# Altium PCB Webbie-V3.0.PcbDoc (part 2 of 3)
Units mil, origin at the board's own origin, x right, y up, seen from the top; angles counter-clockwise.
Board outline 3937.01 x 1574.8 mil, 2 copper layers (Top Layer, Bottom Layer), stack 62.8 mil thick; 134 components, 93 nets, 484 pads, 190 vias.
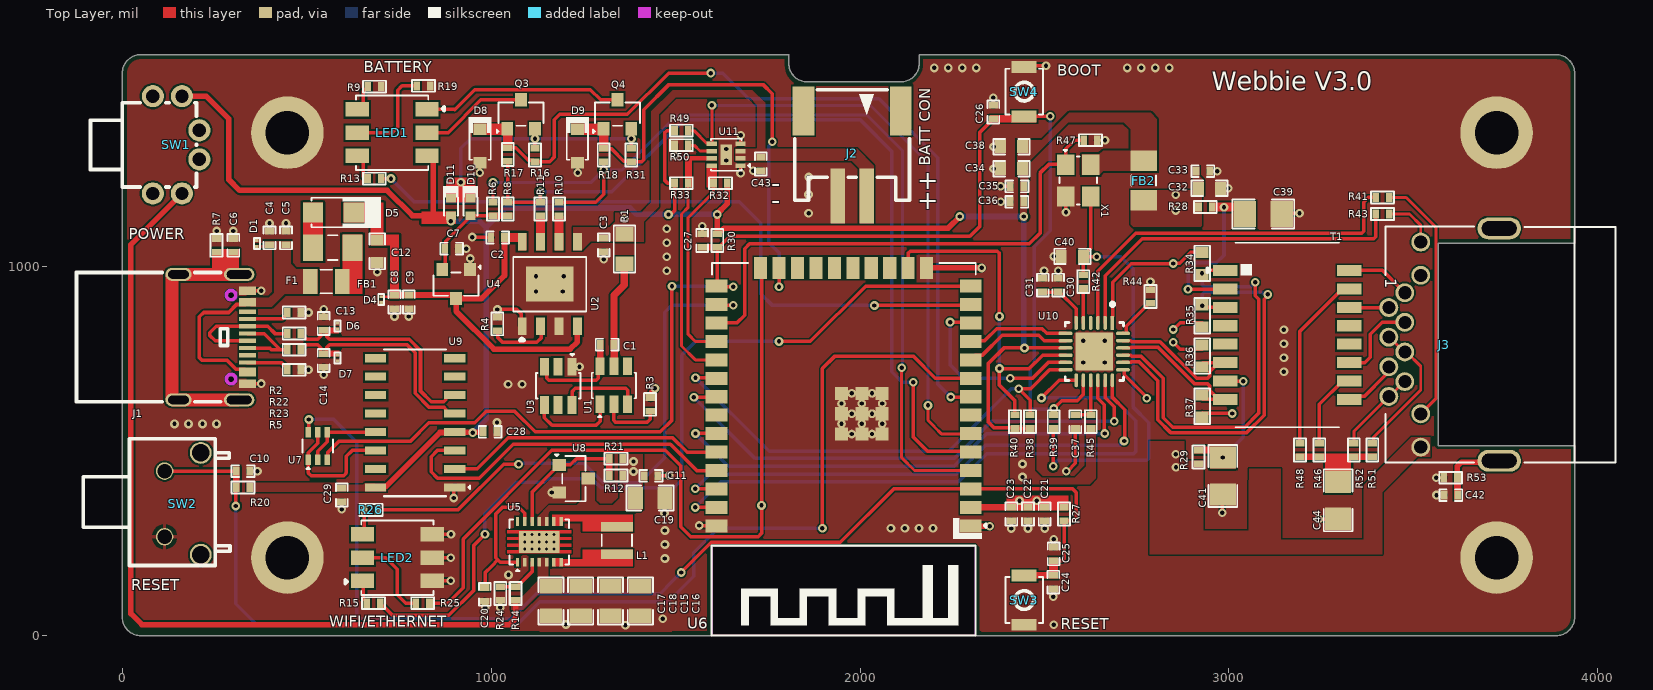
[diagram p0: Top Layer view]

## Part data (continued)
R2 R5: library part RC0402FR-075K1L, "RES 5.1K OHM 1% 1/16W 0402", Case Code (Imperial)=0402, Case Code (Metric)=1005, LCSC Part Number=C105872, Manufacturer=Yageo, Max Operating Temperature=155°C, Max Power Dissipation=63mW, Min Operating Temperature=-55°C, Package Quantity=1, Resistance=5.1kR, Resistance Tolerance=1%, Resistor Type="Thick Film", Temperature Coefficient=100ppm/°C, Voltage Rating=50V, Case/Package=0402, Category="Chip SMD Resistors", ComponentLink1Description=https://datasheet.ciiva.com/7983/1018594-7983519.pdf?src-supplier=Element14, ComponentLink1URL=https://datasheet.ciiva.com/7983/1018594-7983519.pdf?src-supplier=Element14, ComponentLink2Description=https://datasheet.ciiva.com/46394/1018594-46394936.pdf?src-supplier=Element14, ComponentLink2URL=https://datasheet.ciiva.com/46394/1018594-46394936.pdf?src-supplier=Element14, ComponentLink3Description=https://datasheet.ciiva.com/2453/pyu-r-int-thick-7-2453401.pdf?src-supplier=Digi-Key, ComponentLink3URL=https://datasheet.ciiva.com/2453/pyu-r-int-thick-7-2453401.pdf?src-supplier=Digi-Key, ComponentLink4Description=https://datasheet.ciiva.com/2453/pyu-r-int-thick-7-2453402.pdf?src-supplier=Digi-Key, ComponentLink4URL=https://datasheet.ciiva.com/2453/pyu-r-int-thick-7-2453402.pdf?src-supplier=Digi-Key, ComponentLink5Description=https://datasheet.ciiva.com/2453/pyu-r-int-thick-7-2453400.pdf?src-supplier=Digi-Key, ComponentLink5URL=https://datasheet.ciiva.com/2453/pyu-r-int-thick-7-2453400.pdf?src-supplier=Digi-Key, ComponentLink6Description=https://datasheet.ciiva.com/12558/pyu-rc0402-51-rohs-l-6-r-8721-12558460.pdf?src-supplier=Mouser, ComponentLink6URL=https://datasheet.ciiva.com/12558/pyu-rc0402-51-rohs-l-6-r-8721-12558460.pdf?src-supplier=Mouser, ComponentLink7Description=https://datasheet.ciiva.com/16744/pyu-rc0402-51-rohs-l-6-r-16744283.pdf?src-supplier=Future+Electronics, ComponentLink7URL=https://datasheet.ciiva.com/16744/pyu-rc0402-51-rohs-l-6-r-16744283.pdf?src-supplier=Future+Electronics, ComponentLink8Description=https://datasheet.ciiva.com/15189/getdatasheetpartid-323636-15189493.pdf?src-supplier=Verical, ComponentLink8URL=https://datasheet.ciiva.com/15189/getdatasheetpartid-323636-15189493.pdf?src-supplier=Verical, Construction=Rectangular, Depth=0.5mm, Features="Moisture Resistant", Height=0.016inch, Item Type=Resistor, Lead Free="Lead Free", Length=1mm, Manufacturer Part Number=RC0402FR-075K1L, Military Standard=Not, Number of Terminations=2, Packaging="Tape and Reel", Power Rating=63mW, Pricing 1="10000=0.00085 (USD)", RoHS=Yes, RoHS Compliant=Yes, Series=RC, Stock 1=65000, Supplier 1=Avnet, Supplier Part Number 1=RC0402FR-075K1L, Technology="THICK FILM", Termination=SMD/SMT, Tolerance=1%, Voltage Rating (DC)=50V, Width=0.02inch, Working Voltage=50V
R3 R41 R43: library part CRCW04021K00FKEDHP, "RES SMD 1K OHM 1% 1/5W 0402", Case Code (Imperial)=0402, Case Code (Metric)=1005, LCSC Part Number=C313354, Manufacturer="Vishay Dale", Max Operating Temperature=155°C, Max Power Dissipation=125mW, Min Operating Temperature=-55°C, Package Quantity=10, Resistance=1kR, Resistance Tolerance=1%, Resistor Type="Thick Film", Supplier Part Number 1=541-1.00KYCT-ND, Temperature Coefficient=100ppm/°C, Voltage Rating=50V, Case/Package=0402, ComponentLink1Description=http://www.farnell.com/datasheets/2339608.pdf?src-supplier=Element14, ComponentLink1URL=http://www.farnell.com/datasheets/2339608.pdf?src-supplier=Element14, ComponentLink2Description=http://www.vishay.com/docs/20043/crcwhpe3.pdf?src-supplier=Digi-Key, ComponentLink2URL=http://www.vishay.com/docs/20043/crcwhpe3.pdf?src-supplier=Digi-Key, ComponentLink3Description=http://www.mouser.com/ds/2/427/crcwhpe3-46056.pdf?src-supplier=Mouser, ComponentLink3URL=http://www.mouser.com/ds/2/427/crcwhpe3-46056.pdf?src-supplier=Mouser, ComponentLink4Description=http://www.vishay.com/docs/20043/crcwhpe3.pdf?src-supplier=Avnet, ComponentLink4URL=http://www.vishay.com/docs/20043/crcwhpe3.pdf?src-supplier=Avnet, ComponentLink5Description=http://www.vishay.com/docs/20043/crcwhpe3.pdf?src-supplier=Future+Electronics, ComponentLink5URL=http://www.vishay.com/docs/20043/crcwhpe3.pdf?src-supplier=Future+Electronics, Construction=Rectangular, Contact Plating=Tin, Depth=0.5mm, Features="Automotive AEC-Q200", Height=0.3mm, Lead Free="Lead Free", Length=1mm, Manufacturer Part Number=CRCW04021K00FKEDHP, Military Standard=Not, Mount="Surface Mount", Number of Pins=2, Number of Terminations=2, Packaging="Tape and Reel", Power Rating=125mW, Pricing 1="1=0.15, 10=0.132, 100=0.0506, 1000=0.02226, 2500=0.01923, 5000=0.0172 (USD)", Radiation Hardening=No, REACH SVHC=Unknown, RoHS Compliant=Yes, Series=CRCW-HP, Size Code=0402, Stock 1=315989, Supplier 1=Digi-Key, Technology="THICK FILM", Termination=SMD/SMT, Tolerance=1%, Voltage Rating (DC)=50V, Weight=2.3E-05oz, Width=0.5mm
R4: library part RC0402FR-071K2L, "RES 1.2K OHM 1% 1/16W 0402", Case Code (Imperial)=0402, Case Code (Metric)=1005, LCSC Part Number=C138040, Manufacturer=Yageo, Max Operating Temperature=155°C, Max Power Dissipation=63mW, Min Operating Temperature=-55°C, Package Quantity=1, Resistance=1.2kR, Resistance Tolerance=1%, Resistor Type="Thick Film", Temperature Coefficient=100ppm/°C, Voltage Rating=50V, Case/Package=0402, Category="Chip SMD Resistors", ComponentLink1Description=https://datasheet.ciiva.com/11808/0900766b80c66297-11808455.pdf?src-supplier=RSComponents, ComponentLink1URL=https://datasheet.ciiva.com/11808/0900766b80c66297-11808455.pdf?src-supplier=RSComponents, ComponentLink2Description=https://datasheet.ciiva.com/2453/pyu-r-int-thick-7-2453467.pdf?src-supplier=Digi-Key, ComponentLink2URL=https://datasheet.ciiva.com/2453/pyu-r-int-thick-7-2453467.pdf?src-supplier=Digi-Key, ComponentLink3Description=https://datasheet.ciiva.com/2453/pyu-r-int-thick-7-2453468.pdf?src-supplier=Digi-Key, ComponentLink3URL=https://datasheet.ciiva.com/2453/pyu-r-int-thick-7-2453468.pdf?src-supplier=Digi-Key, ComponentLink4Description=https://datasheet.ciiva.com/2453/pyu-r-int-thick-7-2453466.pdf?src-supplier=Digi-Key, ComponentLink4URL=https://datasheet.ciiva.com/2453/pyu-r-int-thick-7-2453466.pdf?src-supplier=Digi-Key, ComponentLink5Description=https://datasheet.ciiva.com/7849/1018594-7849861.pdf?src-supplier=Element14, ComponentLink5URL=https://datasheet.ciiva.com/7849/1018594-7849861.pdf?src-supplier=Element14, ComponentLink6Description=https://datasheet.ciiva.com/7849/1018594-7849862.pdf?src-supplier=Element14, ComponentLink6URL=https://datasheet.ciiva.com/7849/1018594-7849862.pdf?src-supplier=Element14, ComponentLink7Description=https://datasheet.ciiva.com/15189/getdatasheetpartid-323716-15189366.pdf?src-supplier=Verical, ComponentLink7URL=https://datasheet.ciiva.com/15189/getdatasheetpartid-323716-15189366.pdf?src-supplier=Verical, ComponentLink8Description=https://datasheet.ciiva.com/16745/pyu-rc0402-51-rohs-l-6-r-16745005.pdf?src-supplier=Future+Electronics, ComponentLink8URL=https://datasheet.ciiva.com/16745/pyu-rc0402-51-rohs-l-6-r-16745005.pdf?src-supplier=Future+Electronics, Construction=Rectangular, Depth=0.5mm, Features="Moisture Resistant", Height=0.016inch, Item Type=Resistor, Lead Free="Lead Free", Length=0.039inch, Manufacturer Part Number=RC0402FR-071K2L, Military Standard=Not, Number of Terminations=2, Packaging="Tape and Reel", Power Rating=63mW, Pricing 1="10000=0.00085 (USD)", RoHS=Yes, RoHS Compliant=Yes, Series=RC, Size Code=0402, Stock 1=170000, Supplier 1=Avnet, Supplier Part Number 1=RC0402FR-071K2L, Technology="THICK FILM", Termination=SMD/SMT, Tolerance=1%, Width=0.02inch
R6 R8 R21: library part RC0402FR-07100KL, "RES 100K OHM 1% 1/16W 0402", Case Code (Imperial)=0402, Case Code (Metric)=1005, LCSC Part Number=C60491, Manufacturer=Yageo, Max Operating Temperature=155°C, Max Power Dissipation=63mW, Min Operating Temperature=-55°C, Package Quantity=1, Resistance=100kR, Resistance Tolerance=1%, Resistor Type="Thick Film", Supplier Part Number 1=603-RC0402FR-07100KL, Temperature Coefficient=100ppm/°C, Voltage Rating=50V, Case/Package=0402, Category="Chip SMD Resistors", ComponentLink1Description=https://datasheet.ciiva.com/11819/0900766b80c66297-11819452.pdf?src-supplier=RSComponents, ComponentLink1URL=https://datasheet.ciiva.com/11819/0900766b80c66297-11819452.pdf?src-supplier=RSComponents, ComponentLink2Description=https://datasheet.ciiva.com/22747/1018594-22747509.pdf?src-supplier=Element14, ComponentLink2URL=https://datasheet.ciiva.com/22747/1018594-22747509.pdf?src-supplier=Element14, ComponentLink3Description=https://datasheet.ciiva.com/2453/pyu-r-int-thick-7-2453362.pdf?src-supplier=Digi-Key, ComponentLink3URL=https://datasheet.ciiva.com/2453/pyu-r-int-thick-7-2453362.pdf?src-supplier=Digi-Key, ComponentLink4Description=https://datasheet.ciiva.com/2453/pyu-r-int-thick-7-2453363.pdf?src-supplier=Digi-Key, ComponentLink4URL=https://datasheet.ciiva.com/2453/pyu-r-int-thick-7-2453363.pdf?src-supplier=Digi-Key, ComponentLink5Description=https://datasheet.ciiva.com/2453/pyu-r-int-thick-7-2453361.pdf?src-supplier=Digi-Key, ComponentLink5URL=https://datasheet.ciiva.com/2453/pyu-r-int-thick-7-2453361.pdf?src-supplier=Digi-Key, ComponentLink6Description=https://datasheet.ciiva.com/12667/pyu-rc0402-51-rohs-l-6-r-12667930.pdf?src-supplier=Mouser, ComponentLink6URL=https://datasheet.ciiva.com/12667/pyu-rc0402-51-rohs-l-6-r-12667930.pdf?src-supplier=Mouser, ComponentLink7Description=https://datasheet.ciiva.com/15189/getdatasheetpartid-323696-15189334.pdf?src-supplier=Verical, ComponentLink7URL=https://datasheet.ciiva.com/15189/getdatasheetpartid-323696-15189334.pdf?src-supplier=Verical, Construction=Rectangular, Depth=0.5mm, Features="Moisture Resistant", Height=0.016inch, Item Type=Resistor, Lead Free="Lead Free", Length=0.039inch, Manufacturer Part Number=RC0402FR-07100KL, Military Standard=Not, Number of Terminations=2, Packaging="Tape and Reel", Power Rating=63mW, Pricing 1="1=0.10000, 10=0.01200, 50=0.01200, 100=0.00500, 1000=0.00300, 2500=0.00200, 10000=0.00100 (USD)", REACH SVHC="No SVHC", RoHS=Yes, RoHS Compliant=Yes, Series=RC, Stock 1=7759549, Supplier 1=Mouser, Technology="THICK FILM", Termination=SMD/SMT, Tolerance=1%, Width=0.02inch, Working Voltage=50V
R7 R53: library part AF0402JR-071ML, "RES SMD 1M OHM 5% 1/16W 0402", Case/Package=0402, LCSC Part Number=C144054, Manufacturer=Yageo, Max Operating Temperature=155°C, Max Power Dissipation=63mW, Min Operating Temperature=-55°C, Resistance=1MR, Resistor Type="Thick Film", Supplier Part Number 1=AF0402JR-071ML-ND, Temperature Coefficient=100ppm/°C, Tolerance=5%, ComponentLink1Description=https://www.yageo.com/upload/media/product/productsearch/datasheet/rchip/PYu-AF_51_RoHS_L_6.pdf?src-supplier=Digi-Key, ComponentLink1URL=https://www.yageo.com/upload/media/product/productsearch/datasheet/rchip/PYu-AF_51_RoHS_L_6.pdf?src-supplier=Digi-Key, Features="Moisture Resistant,Anti-Sulfur", Height=0.015inch, Item Type=Resistor, Length=0.039inch, Manufacturer Part Number=AF0402JR-071ML, Number of Terminations=2, Packaging="Tape and Reel", Pricing 1="10000=0.00408 (USD)", RoHS Compliant=Yes, Stock 1=0, Supplier 1=Digi-Key, Width=0.02inch
R9 R13 R15 R19 R25 R26: library part RC0402FR-07470RL, "RES 470 OHM 1% 1/16W 0402", Case Code (Imperial)=0402, Case Code (Metric)=1005, LCSC Part Number=C114877, Manufacturer=Yageo, Max Operating Temperature=155°C, Max Power Dissipation=63mW, Min Operating Temperature=-55°C, Package Quantity=1, Power Rating=62.5mW, Resistance Tolerance=1%, Resistor Type="Thick Film", Temperature Coefficient=100ppm/°C, Voltage Rating=50V, Case/Package=0402, ComponentLink1Description=https://datasheet.ciiva.com/46412/1018594-46412838.pdf?src-supplier=Element14, ComponentLink1URL=https://datasheet.ciiva.com/46412/1018594-46412838.pdf?src-supplier=Element14, ComponentLink2Description=https://datasheet.ciiva.com/2453/pyu-r-int-thick-7-2453377.pdf?src-supplier=Digikey, ComponentLink2URL=https://datasheet.ciiva.com/2453/pyu-r-int-thick-7-2453377.pdf?src-supplier=Digikey, ComponentLink3Description=https://datasheet.ciiva.com/2453/pyu-r-int-thick-7-2453378.pdf?src-supplier=Digikey, ComponentLink3URL=https://datasheet.ciiva.com/2453/pyu-r-int-thick-7-2453378.pdf?src-supplier=Digikey, ComponentLink4Description=https://datasheet.ciiva.com/2453/pyu-r-int-thick-7-2453376.pdf?src-supplier=Digikey, ComponentLink4URL=https://datasheet.ciiva.com/2453/pyu-r-int-thick-7-2453376.pdf?src-supplier=Digikey, ComponentLink5Description=https://datasheet.ciiva.com/7850/1018594-7850015.pdf?src-supplier=Element14, ComponentLink5URL=https://datasheet.ciiva.com/7850/1018594-7850015.pdf?src-supplier=Element14, ComponentLink6Description=https://datasheet.ciiva.com/7850/1018594-7850014.pdf?src-supplier=Element14, ComponentLink6URL=https://datasheet.ciiva.com/7850/1018594-7850014.pdf?src-supplier=Element14, ComponentLink7Description=https://datasheet.ciiva.com/15189/getdatasheetpartid-330246-15189463.pdf?src-supplier=Verical, ComponentLink7URL=https://datasheet.ciiva.com/15189/getdatasheetpartid-330246-15189463.pdf?src-supplier=Verical, Construction=Rectangular, Depth=0.5mm, Features="Moisture Resistant", Height=0.016inch, Item Type=Resistor, Lead Free="Lead Free", Length=1mm, Manufacturer Part Number=RC0402FR-07470RL, Military Standard=Not, Number of Terminations=2, Packaging="Tape and Reel", Pricing="10000=0.00085 (USD)", Reach SVHC Compliant=No, RoHS=Yes, RoHS Compliant=Yes, Series=RC, Stock=10000, Supplier=Avnet, Supplier Part Number=RC0402FR-07470RL, Termination=SMD/SMT, Tolerance=1%, Voltage Rating (AC)=50V, Width=0.02inch, Working Voltage=50V
R10 R11: library part RC0402FR-0722RL, "RES 22 OHM 1% 1/16W 0402", Case Code (Imperial)=0402, Case Code (Metric)=1005, LCSC Part Number=C114765, Manufacturer=Yageo, Max Operating Temperature=155°C, Max Power Dissipation=63mW, Min Operating Temperature=-55°C, Power Rating=62.5mW, Resistance Tolerance=1%, Resistor Type="Thick Film", Temperature Coefficient=100ppm/°C, Voltage Rating=50V, Case/Package=0402, Category="Chip SMD Resistors", ComponentLink1Description=https://datasheet.ciiva.com/11819/0900766b80c66297-11819462.pdf?src-supplier=RSComponents, ComponentLink1URL=https://datasheet.ciiva.com/11819/0900766b80c66297-11819462.pdf?src-supplier=RSComponents, ComponentLink2Description=https://datasheet.ciiva.com/7849/1018594-7849912.pdf?src-supplier=Element14, ComponentLink2URL=https://datasheet.ciiva.com/7849/1018594-7849912.pdf?src-supplier=Element14, ComponentLink3Description=https://datasheet.ciiva.com/7849/1018594-7849911.pdf?src-supplier=Element14, ComponentLink3URL=https://datasheet.ciiva.com/7849/1018594-7849911.pdf?src-supplier=Element14, ComponentLink4Description=https://datasheet.ciiva.com/16930/pyu-rc0402-51-rohs-l-6-r-16930687.pdf?src-supplier=Future+Electronics, ComponentLink4URL=https://datasheet.ciiva.com/16930/pyu-rc0402-51-rohs-l-6-r-16930687.pdf?src-supplier=Future+Electronics, ComponentLink5Description=https://datasheet.ciiva.com/26829/getdatasheetpartid-554995-26829991.pdf?src-supplier=Verical, ComponentLink5URL=https://datasheet.ciiva.com/26829/getdatasheetpartid-554995-26829991.pdf?src-supplier=Verical, Construction=Rectangular, Depth=0.5mm, Features="Moisture Resistant", Height=0.32mm, Item Type=Resistor, Lead Free="Lead Free", Length=1mm, Manufacturer Part Number=RC0402FR-0722RL, Military Standard=Not, Number of Pins=2, Number of Terminations=2, Packaging="Tape and Reel", Pricing 1="10000=0.00085 (USD)", Reach SVHC Compliant=Yes, Resistance=22R, RoHS=Yes, RoHS Compliant=Yes, Series=RC, Size Code=0402, Stock 1=1810000, Supplier 1=Avnet, Supplier Part Number 1=RC0402FR-0722RL, Technology="THICK FILM", Termination=SMD/SMT, Tolerance=1%, Voltage Rating (DC)=50V, Width=0.5mm
R12 R17 R18 R28 R29: library part RC0402FR-070RL, "RES 0 OHM JUMPER 1/16W 0402", Case Code (Imperial)=0402, Case Code (Metric)=1005, LCSC Part Number=C106231, Manufacturer=Yageo, Max Operating Temperature=155°C, Max Power Dissipation=63mW, Min Operating Temperature=-55°C, Power Rating=62.5mW, Resistor Type="Thick Film", Supplier Part Number 1=603-RC0402FR-070RL, Temperature Coefficient=200ppm/°C, Tolerance=1%, Voltage Rating=50V, Case/Package=0402, ComponentLink1Description=https://datasheet.ciiva.com/8896/pyu-rc0402-51-rohs-l-6-8896149.pdf?src-supplier=Avnet, ComponentLink1URL=https://datasheet.ciiva.com/8896/pyu-rc0402-51-rohs-l-6-8896149.pdf?src-supplier=Avnet, ComponentLink2Description=https://datasheet.ciiva.com/16790/pyu-rc0402-51-rohs-l-6-r-16790444.pdf?src-supplier=Future+Electronics, ComponentLink2URL=https://datasheet.ciiva.com/16790/pyu-rc0402-51-rohs-l-6-r-16790444.pdf?src-supplier=Future+Electronics, Contact Plating=Tin,Matte, Features="Moisture Resistant", Height=0.35mm, Item Type=Resistors, Lead Free="Lead Free", Length=1mm, Manufacturer Part Number=RC0402FR-070RL, Mount="Surface Mount", Number of Terminations=2, Packaging="Tape and Reel", Pricing 1="1=0.10000, 10=0.01400, 50=0.01400, 100=0.00600, 1000=0.00300, 5000=0.00200, 10000=0.00100 (USD)", Radiation Hardening=No, Resistance=0R, RoHS=Yes, RoHS Compliant=Yes, Series=RC, Size Code=0402, Stock 1=8556842, Supplier 1=Mouser, Termination=SMD/SMT, Width=0.5mm
R14: library part AC0402FR-07768KL, "62.5mW Thick Film Resistor 50V ±100ppm/℃ ±1% 768kΩ 0402 Chip Resistor - Surface Mount ROHS", LCSC Part Number=C227223, Manufacturer=YAGEO, Package=0402, ComponentLink1Description="LCSC Link", ComponentLink1URL=https://lcsc.com/product-detail/Chip-Resistor-Surface-Mount_YAGEO-AC0402FR-07768KL_C227223.html, Item Type=Resistor, Manufacturer Part Number=AC0402FR-07768KL
R16 R31: library part RC0402FR-071ML, "RES 1M OHM 1% 1/16W 0402", Case Code (Imperial)=0402, Case Code (Metric)=1005, LCSC Part Number=C138033, Manufacturer=Yageo, Max Operating Temperature=155°C, Max Power Dissipation=63mW, Min Operating Temperature=-55°C, Resistance Tolerance=1%, Resistor Type="Thick Film", Supplier Part Number=311-1.00MLRCT-ND, Temperature Coefficient=100ppm/°C, Voltage Rating=50V, Case/Package=0402, Category="Chip SMD Resistors", ComponentLink1Description=https://datasheet.ciiva.com/11808/0900766b80c66297-11808125.pdf?src-supplier=Rs, ComponentLink1URL=https://datasheet.ciiva.com/11808/0900766b80c66297-11808125.pdf?src-supplier=Rs, ComponentLink2Description=https://datasheet.ciiva.com/46394/1018594-46394951.pdf?src-supplier=Element14, ComponentLink2URL=https://datasheet.ciiva.com/46394/1018594-46394951.pdf?src-supplier=Element14, ComponentLink3Description=https://datasheet.ciiva.com/7849/1018594-7849883.pdf?src-supplier=Element14, ComponentLink3URL=https://datasheet.ciiva.com/7849/1018594-7849883.pdf?src-supplier=Element14, ComponentLink4Description=https://datasheet.ciiva.com/7849/1018594-7849882.pdf?src-supplier=Element14, ComponentLink4URL=https://datasheet.ciiva.com/7849/1018594-7849882.pdf?src-supplier=Element14, ComponentLink5Description=https://datasheet.ciiva.com/16741/pyu-rc0402-51-rohs-l-6-r-16741081.pdf?src-supplier=Future+Electronics, ComponentLink5URL=https://datasheet.ciiva.com/16741/pyu-rc0402-51-rohs-l-6-r-16741081.pdf?src-supplier=Future+Electronics, Construction=Rectangular, Depth=0.5mm, Features="Moisture Resistant", Height=0.32mm, Item Type=Resistor, Lead Free=5697LeadFree, Length=1mm, Manufacturer Part Number=RC0402FR-071ML, Military Standard=Not, Number of Terminations=2, Packaging="Tape and Reel", Power Rating=63mW, Pricing="1=0.1, 10=0.015, 50=0.0088, 100=0.0073, 500=0.00488, 1000=0.00417, 5000=0.00297 (USD)", Reach SVHC Compliant=Unknown, RoHS=Yes, RoHS Compliant=Yes, Series=RC, Stock=6516, Supplier=Digikey, Technology="THICK FILM", Termination=SMD/SMT, Tolerance=1%, Voltage Rating (AC)=50V
R20 R27 R30 R32 R33 R40 R45 R47 R49 R50: library part RC0402FR-0710KL, "RES 10K OHM 1% 1/16W 0402", Case Code (Imperial)=0402, Case Code (Metric)=1005, LCSC Part Number=C60490, Manufacturer=Yageo, Max Operating Temperature=155°C, Max Power Dissipation=63mW, Min Operating Temperature=-55°C, Power Rating=62.5mW, Resistance=10kR, Resistance Tolerance=1%, Resistor Type="Thick Film", Supplier Part Number 1=603-RC0402FR-0710KL, Temperature Coefficient=100ppm/°C, Voltage Rating=50V, Case/Package=0402, Category="Chip SMD Resistors", ComponentLink1Description=https://datasheet.ciiva.com/7660/38568-7660787.pdf?src-supplier=Element14, ComponentLink1URL=https://datasheet.ciiva.com/7660/38568-7660787.pdf?src-supplier=Element14, ComponentLink2Description=https://datasheet.ciiva.com/7849/1686128-7849814.pdf?src-supplier=Element14, ComponentLink2URL=https://datasheet.ciiva.com/7849/1686128-7849814.pdf?src-supplier=Element14, ComponentLink3Description=https://datasheet.ciiva.com/7983/1018594-7983486.pdf?src-supplier=Element14, ComponentLink3URL=https://datasheet.ciiva.com/7983/1018594-7983486.pdf?src-supplier=Element14, ComponentLink4Description=https://datasheet.ciiva.com/22747/1018594-22747512.pdf?src-supplier=Element14, ComponentLink4URL=https://datasheet.ciiva.com/22747/1018594-22747512.pdf?src-supplier=Element14, ComponentLink5Description=https://datasheet.ciiva.com/12667/pyu-rc0402-51-rohs-l-6-r-12667067.pdf?src-supplier=Mouser, ComponentLink5URL=https://datasheet.ciiva.com/12667/pyu-rc0402-51-rohs-l-6-r-12667067.pdf?src-supplier=Mouser, ComponentLink6Description=https://datasheet.ciiva.com/7849/1784430-7849813.pdf?src-supplier=Element14, ComponentLink6URL=https://datasheet.ciiva.com/7849/1784430-7849813.pdf?src-supplier=Element14, ComponentLink7Description=https://datasheet.ciiva.com/7849/1784430-7849815.pdf?src-supplier=Element14, ComponentLink7URL=https://datasheet.ciiva.com/7849/1784430-7849815.pdf?src-supplier=Element14, Construction=Rectangular, Depth=0.5mm, Features="Moisture Resistant", Height=0.32mm, Item Type=Resistor, Lead Free="Lead Free", Lead Pitch=0.2mm, Length=1mm, Manufacturer Part Number=RC0402FR-0710KL, Military Standard=Not, Number of Pins=2, Number of Terminations=2, Packaging="Tape and Reel", Pricing 1="1=0.10000, 10=0.01400, 50=0.01400, 100=0.00500, 1000=0.00300, 10000=0.00200 (USD)", REACH SVHC="No SVHC", RoHS=Yes, RoHS Compliant=Yes, Series=RC, Stock 1=18648329, Supplier 1=Mouser, Termination=SMD/SMT, Tolerance=1%, Voltage Rating (DC)=50V, Width=0.5mm, Working Voltage=50V
R22 R23: library part RC0402FR-0727RL, "62.5mW Thick Film Resistors 50V ±100ppm/℃ ±1% 27Ω 0402 Chip Resistor - Surface Mount ROHS", LCSC Part Number=C138021, Manufacturer=YAGEO, Package=0402, ComponentLink1Description="LCSC Link", ComponentLink1URL=https://www.lcsc.com/product-detail/Chip-Resistor-Surface-Mount_YAGEO-RC0402FR-0727RL_C138021.html, Item Type=Resistor, Manufacturer Part Number=RC0402FR-0727RL
R24: library part FRC0402F1373TS, "62.5mW Thick Film Resistor 50V ±100ppm/℃ ±1% 137kΩ 0402 Chip Resistor - Surface Mount ROHS", LCSC Part Number=C5153963, Manufacturer=FOJAN, Package=0402, ComponentLink1Description="LCSC Link", ComponentLink1URL=https://lcsc.com/product-detail/Chip-Resistor-Surface-Mount_FOJAN-FRC0402F1373TS_C5153963.html, Item Type=Resistor, Manufacturer Part Number=FRC0402F1373TS
R34 R35 R36 R37: library part RC0603FR-0749R9L, "RES 49.9 OHM 1% 1/10W 0603", Case Code (Imperial)=0603, Case Code (Metric)=1608, LCSC Part Number=C114625, Manufacturer=Yageo, Max Operating Temperature=155°C, Max Power Dissipation=100mW, Min Operating Temperature=-55°C, Resistance Tolerance=1%, Resistor Type="Thick Film", Temperature Coefficient=100ppm/°C, Voltage Rating=50V, Case/Package=0603, Category="Chip SMD Resistors", ComponentLink1Description=https://datasheet.ciiva.com/11808/0900766b80f96399-11808223.pdf?src-supplier=RSComponents, ComponentLink1URL=https://datasheet.ciiva.com/11808/0900766b80f96399-11808223.pdf?src-supplier=RSComponents, ComponentLink2Description=https://datasheet.ciiva.com/22747/443971-22747527.pdf?src-supplier=Element14, ComponentLink2URL=https://datasheet.ciiva.com/22747/443971-22747527.pdf?src-supplier=Element14, ComponentLink3Description=https://datasheet.ciiva.com/15189/getdatasheetpartid-325421-15189750.pdf?src-supplier=Verical, ComponentLink3URL=https://datasheet.ciiva.com/15189/getdatasheetpartid-325421-15189750.pdf?src-supplier=Verical, Construction=Rectangular, Depth=0.8mm, Features="Moisture Resistant", Height=0.45mm, Item Type=Resistor, Lead Free="Lead Free", Length=1.6mm, Manufacturer Part Number=RC0603FR-0749R9L, Military Standard=Not, Number of Pins=2, Number of Terminations=2, Packaging="Tape and Reel", Power Rating=100mW, Pricing 1="5000=0.00280 (USD)", REACH SVHC="No SVHC", Resistance=49.9R, RoHS=Yes, RoHS Compliant=Yes, Series=RC, Size Code=0603, Stock 1=2075000, Supplier 1="Arrow Electronics", Supplier Part Number 1=RC0603FR-0749R9L, Technology="THICK FILM", Termination=SMD/SMT, Tolerance=1%, Voltage Rating (DC)=50V
R38: library part RC0402FR-071K5L, "RES 1.5K OHM 1% 1/16W 0402", Case Code (Imperial)=0402, Case Code (Metric)=1005, LCSC Part Number=C114759, Manufacturer=Yageo, Max Operating Temperature=155°C, Max Power Dissipation=63mW, Min Operating Temperature=-55°C, Package Quantity=1, Power Rating=62.5mW, Resistance=1.5kR, Resistance Tolerance=1%, Resistor Type="Thick Film", Supplier Part Number 1=311-1.50KLRCT-ND, Temperature Coefficient=100ppm/°C, Voltage Rating=50V, Case/Package=0402, Category="Chip SMD Resistors", ComponentLink1Description=https://datasheet.ciiva.com/11808/0900766b80c66297-11808238.pdf?src-supplier=RSComponents, ComponentLink1URL=https://datasheet.ciiva.com/11808/0900766b80c66297-11808238.pdf?src-supplier=RSComponents, ComponentLink2Description=https://datasheet.ciiva.com/46394/1018594-46394950.pdf?src-supplier=Element14, ComponentLink2URL=https://datasheet.ciiva.com/46394/1018594-46394950.pdf?src-supplier=Element14, ComponentLink3Description=https://datasheet.ciiva.com/2453/pyu-r-int-thick-7-2453440.pdf?src-supplier=Digi-Key, ComponentLink3URL=https://datasheet.ciiva.com/2453/pyu-r-int-thick-7-2453440.pdf?src-supplier=Digi-Key, ComponentLink4Description=https://datasheet.ciiva.com/2453/pyu-r-int-thick-7-2453441.pdf?src-supplier=Digi-Key, ComponentLink4URL=https://datasheet.ciiva.com/2453/pyu-r-int-thick-7-2453441.pdf?src-supplier=Digi-Key, ComponentLink5Description=https://datasheet.ciiva.com/2453/pyu-r-int-thick-7-2453439.pdf?src-supplier=Digi-Key, ComponentLink5URL=https://datasheet.ciiva.com/2453/pyu-r-int-thick-7-2453439.pdf?src-supplier=Digi-Key, ComponentLink6Description=https://datasheet.ciiva.com/12558/pyu-rc0402-51-rohs-l-6-r-8721-12558542.pdf?src-supplier=Mouser, ComponentLink6URL=https://datasheet.ciiva.com/12558/pyu-rc0402-51-rohs-l-6-r-8721-12558542.pdf?src-supplier=Mouser, ComponentLink7Description=https://datasheet.ciiva.com/7849/1018594-7849863.pdf?src-supplier=Element14, ComponentLink7URL=https://datasheet.ciiva.com/7849/1018594-7849863.pdf?src-supplier=Element14, ComponentLink8Description=https://datasheet.ciiva.com/7849/1018594-7849864.pdf?src-supplier=Element14, ComponentLink8URL=https://datasheet.ciiva.com/7849/1018594-7849864.pdf?src-supplier=Element14, ComponentLink9Description=https://datasheet.ciiva.com/15189/getdatasheetpartid-323992-15189370.pdf?src-supplier=Verical, ComponentLink9URL=https://datasheet.ciiva.com/15189/getdatasheetpartid-323992-15189370.pdf?src-supplier=Verical, Construction=Rectangular, Depth=0.5mm, Features="Moisture Resistant", Height=0.016inch, Lead Free="Lead Free", Length=1mm, Manufacturer Part Number=RC0402FR-071K5L, Military Standard=Not, Number of Terminations=2, Packaging="Tape and Reel", Pricing 1="1=0.10000, 10=0.01500, 100=0.00610, 1000=0.00275, 2500=0.00239, 5000=0.00197 (USD)", REACH SVHC="No SVHC", RoHS=Yes, RoHS Compliant=Yes, Series=RC, Size Code=0402, Stock 1=2832947, Supplier 1=Digi-Key, Technology="THICK FILM", Termination=SMD/SMT, Tolerance=1%, Width=0.02inch
R39 R42: library part RC0402FR-0733RL, "RES 33 OHM 1% 1/16W 0402", Case Code (Imperial)=0402, Case Code (Metric)=1005, LCSC Part Number=C138002, Manufacturer=Yageo, Max Operating Temperature=155°C, Max Power Dissipation=63mW, Min Operating Temperature=-55°C, Package Quantity=10000, Power Rating=62.5mW, Resistance Tolerance=1%, Resistor Type="Thick Film", Supplier Part Number 1=603-RC0402FR-0733RL, Temperature Coefficient=100ppm/°C, Voltage Rating=50V, Case/Package=0402, Category="Chip SMD Resistors", ComponentLink1Description=https://datasheet.ciiva.com/11819/0900766b80c66297-11819487.pdf?src-supplier=RSComponents, ComponentLink1URL=https://datasheet.ciiva.com/11819/0900766b80c66297-11819487.pdf?src-supplier=RSComponents, ComponentLink2Description=https://datasheet.ciiva.com/24070/pyu-rc0402-51-rohs-l-6-r-8721-24070077.pdf?src-supplier=Mouser, ComponentLink2URL=https://datasheet.ciiva.com/24070/pyu-rc0402-51-rohs-l-6-r-8721-24070077.pdf?src-supplier=Mouser, ComponentLink3Description=https://datasheet.ciiva.com/7849/1018594-7849967.pdf?src-supplier=Element14, ComponentLink3URL=https://datasheet.ciiva.com/7849/1018594-7849967.pdf?src-supplier=Element14, ComponentLink4Description=https://datasheet.ciiva.com/7849/1018594-7849966.pdf?src-supplier=Element14, ComponentLink4URL=https://datasheet.ciiva.com/7849/1018594-7849966.pdf?src-supplier=Element14, ComponentLink5Description=https://datasheet.ciiva.com/15189/getdatasheetpartid-329253-15189431.pdf?src-supplier=Verical, ComponentLink5URL=https://datasheet.ciiva.com/15189/getdatasheetpartid-329253-15189431.pdf?src-supplier=Verical, ComponentLink6Description=https://datasheet.ciiva.com/17070/pyu-rc0402-51-rohs-l-6-r-17070335.pdf?src-supplier=Future+Electronics, ComponentLink6URL=https://datasheet.ciiva.com/17070/pyu-rc0402-51-rohs-l-6-r-17070335.pdf?src-supplier=Future+Electronics, Construction=Rectangular, Depth=0.5mm, Features="Moisture Resistant", Height=0.35mm, Lead Free="Lead Free", Length=1mm, Manufacturer Part Number=RC0402FR-0733RL, Military Standard=Not, Number of Pins=2, Number of Terminations=2, Packaging="Tape and Reel", Pricing 1="1=0.10000, 10=0.01200, 50=0.01200, 100=0.00500, 1000=0.00300, 10000=0.00100 (USD)", REACH SVHC=Unknown, Resistance=33R, RoHS=Yes, RoHS Compliant=Yes, Series=RC, Size Code=0402, Stock 1=1843488, Supplier 1=Mouser, Technology="THICK FILM", Termination=SMD/SMT, Tolerance=1%, Voltage Rating (DC)=50V, Width=0.5mm
R44: library part RT0402BRD0712K1L, "RES SMD 12.1KOHM 0.1% 1/16W 0402", LCSC Part Number=C281773, Manufacturer=Yageo, Supplier Part Number=2068365, Category="Chip SMD Resistors", ComponentLink1Description=https://datasheet.ciiva.com/12812/pyu-rt-1-to-0-05-rohs-l-4-12812462.pdf?src-supplier=Mouser, ComponentLink1URL=https://datasheet.ciiva.com/12812/pyu-rt-1-to-0-05-rohs-l-4-12812462.pdf?src-supplier=Mouser, Item Type=Resistor, Manufacturer Part Number=RT0402BRD0712K1L, Pricing="10000=0.0245, 20000=0.0217, 30000=0.0237, 50000=0.0233, 100000=0.0228, 200000=0.022 (USD)", RoHS=Yes, Stock=60000, Supplier="Future Electronics"
R46 R48 R51 R52: library part RC0402JR-0775RL, "RES 75 OHM 5% 1/16W 0402", Case Code (Imperial)=0402, Case Code (Metric)=1005, LCSC Part Number=C137841, Manufacturer=Yageo, Max Operating Temperature=155°C, Max Power Dissipation=63mW, Min Operating Temperature=-55°C, Power Rating=62.5mW, Resistance Tolerance=5%, Resistor Type="Thick Film", Supplier Part Number=311-75JRCT-ND, Temperature Coefficient=100ppm/°C, Voltage Rating=50V, Case/Package=0402, ComponentLink1Description=https://datasheet.ciiva.com/7983/1018594-7983612.pdf?src-supplier=Element14, ComponentLink1URL=https://datasheet.ciiva.com/7983/1018594-7983612.pdf?src-supplier=Element14, ComponentLink2Description=https://datasheet.ciiva.com/17082/pyu-rc0402-51-rohs-l-6-r-17082239.pdf?src-supplier=Future+Electronics, ComponentLink2URL=https://datasheet.ciiva.com/17082/pyu-rc0402-51-rohs-l-6-r-17082239.pdf?src-supplier=Future+Electronics, Contact Plating=Tin,Lead, Features="Moisture Resistant", Height=0.35mm, Item Type=Resistor, Lead Free="Lead Free", Length=1mm, Manufacturer Part Number=RC0402JR-0775RL, Number of Terminations=2, Packaging="Tape and Reel", Pins=2, Pricing="1=0.1, 10=0.018, 50=0.0102, 100=0.0083, 500=0.00528, 1000=0.00444, 5000=0.00307 (USD)", Reach SVHC Compliant=No, RoHS=Yes, RoHS Compliant=Yes, Series=RC, Stock=2993323, Supplier=Digikey, Termination=SMD/SMT, Tolerance=5%, Voltage Rating (DC)=50V, Width=0.5mm
SW1: "Latching Right Angle DPDT 2.5N Through Hole Pushbutton Switches ROHS", LCSC Part Number=C528772, Manufacturer=Yuandi, Package="Through Hole", ComponentLink1Description="LCSC Link", ComponentLink1URL=https://lcsc.com/product-detail/Pushbutton-Switches_Yuandi-TK-6580A8-1_C528772.html, Item Type=Switch, Manufacturer Part Number=TK-6580A8-1
SW2: "With Bracket 50mA Round Button Right Angle SPST 100,000 Cycles 1.6N 24V Through Hole Tactile Switches ROHS", LCSC Part Number=C2928195, Manufacturer="TE Connectivity", Package="Through Hole", ComponentLink1Description="LCSC Link", ComponentLink1URL=https://lcsc.com/product-detail/Tactile-Switches_TE-Connectivity-1-1825027-4_C2928195.html, Item Type="Tactile Switch", Manufacturer Part Number=1-1825027-4
SW3 SW4: "SWITCH TACTILE SPST-NO 0.05A 12V", Contact Current Rating=50mA, Contact Resistance=100mR, Insulation Resistance=100MR, LCSC Part Number=C231329, Manufacturer=Omron, Max Operating Temperature=70°C, Max Voltage Rating (DC)=12V, Min Operating Temperature=-25°C, Operating Force=1.5N, Package Quantity=1, Ratings="Dust Proof,IP40", Supplier Part Number 1=SW1020DKR-ND, Actuator Length=0.4mm, Actuator Type=Standard, ComponentLink1Description=http://www.farnell.com/datasheets/60838.pdf?src-supplier=Farnell, ComponentLink1URL=http://www.farnell.com/datasheets/60838.pdf?src-supplier=Farnell, ComponentLink2Description=http://www.farnell.com/datasheets/60838.pdf?src-supplier=Element14, ComponentLink2URL=http://www.farnell.com/datasheets/60838.pdf?src-supplier=Element14, ComponentLink3Description=https://omronfs.omron.com/en_US/ecb/products/pdf/en-b3u.pdf?src-supplier=Digi-Key, ComponentLink3URL=https://omronfs.omron.com/en_US/ecb/products/pdf/en-b3u.pdf?src-supplier=Digi-Key, ComponentLink4Description=http://www.omron.com/ecb/products/pdf/en-b3u.pdf?src-supplier=Digi-Key, ComponentLink4URL=http://www.omron.com/ecb/products/pdf/en-b3u.pdf?src-supplier=Digi-Key, ComponentLink5Description=https://www.distrelec.biz/Web/Downloads/he/et/B3U_eng_datasheet.pdf?mime=application%2Fpdf&src-supplier=Distrelec, ComponentLink5URL=https://www.distrelec.biz/Web/Downloads/he/et/B3U_eng_datasheet.pdf?mime=application%2Fpdf&src-supplier=Distrelec, ComponentLink6Description=http://www.onlinecomponents.com/productFiles/mf-OM/en-b3u.pdf?src-supplier=Onlinecomponents.com, ComponentLink6URL=http://www.onlinecomponents.com/productFiles/mf-OM/en-b3u.pdf?src-supplier=Onlinecomponents.com, ComponentLink7Description=https://www.verical.com/server-webapp/html/getDatasheet?partID=552554&src-supplier=Verical, ComponentLink7URL=https://www.verical.com/server-webapp/html/getDatasheet?partID=552554&src-supplier=Verical, ComponentLink8Description=http://www.farnell.com/datasheets/1685550.pdf?src-supplier=Element14, ComponentLink8URL=http://www.farnell.com/datasheets/1685550.pdf?src-supplier=Element14, ComponentLink9Description=http://www.farnell.com/datasheets/2610940.pdf?src-supplier=Farnell, ComponentLink9URL=http://www.farnell.com/datasheets/2610940.pdf?src-supplier=Farnell, ComponentLink10Description=https://www.alliedelec.com/m/d/4c8a9ef82804fc3c241a13c1e298fd73.pdf?src-supplier=Allied+Electronics, ComponentLink10URL=https://www.alliedelec.com/m/d/4c8a9ef82804fc3c241a13c1e298fd73.pdf?src-supplier=Allied+Electronics, Contact Material=Silver, Current Rating=50mA, Depth=2.5mm, Electrical Life=200000Cycles, Height=1.2mm, Illumination Type=Non-Illuminated,Illuminated, Item Type=Switch, Lead Free="Lead Free", Length=4mm, Manufacturer Part Number=B3U-1000P, Max Current Rating=50mA, Mechanical Life=200000Cycles, Mount="Surface Mount", Orientation=Straight, Packaging="Tape and Reel", Pricing 1="1=1, 10=0.961, 25=0.9064, 50=0.7976, 100=0.7251, 250=0.68888, 500=0.67074, 1000=0.52571 (USD)", REACH SVHC=Unknown, Stock 1=116454, Supplier 1=Digi-Key, Switch Function=Off-Mom, Switch Travel=0.15mm, Termination=SMD/SMT, Throw Configuration=SPST, Voltage Rating (DC)=12V, Weight=0.000776oz, Width=3mm
T1: "XFRMR MAGNETIC 1PORT 1:1 10/100", Case/Package=Module, DC Resistance (DCR)=650mR, Isolation Voltage=1.5kV, LCSC Part Number=C18584, Manufacturer=Pulse, Max Operating Temperature=70°C, Min Operating Temperature=0°C, Package Quantity=40, Category=Transformers, ComponentLink1Description=https://datasheet.ciiva.com/2938/10-100base-tsingleportsmdmagnetics-rev2008-2938779.pdf?src-supplier=Digikey, ComponentLink1URL=https://datasheet.ciiva.com/2938/10-100base-tsingleportsmdmagnetics-rev2008-2938779.pdf?src-supplier=Digikey, Depth=9.53mm, Height=6.09mm, Height - Seated (Max)=6.22mm, Insertion Loss=-1.1dB, Item Type="RJ45 Transformer", Lead Free="Lead Free", Lead/Base Style="Gull Wing", Length=12.7mm, Manufacturer Part Number=H1102NL, Mounting Technology="Surface Mount", Packaging=Rail/Tube, Pins=16, Pricing="1=3.05066, 10=2.98754, 30=2.92442, 50=2.8613, 100=2.79819, 250=2.73507, 500=2.68247 (USD)", Radiation Hardening=No, Return Loss=-11.5dB, RoHS=Yes, RoHS Compliant=Yes, Series=-, Shielding=Unshielded, Stock=500, Supplier=Avnet, Supplier Part Number=H1102NL, Termination=SMD/SMT, Turns Ratio=1:1, Weight=0.098767oz, Width=7.11mm
U1: "SOT-23-6 Battery Management ROHS", LCSC Part Number=C2909013, Manufacturer="Shenzhen Fuman Elec", Package=SOT-23-6, ComponentLink1Description=LCSC, ComponentLink1URL=https://www.lcsc.com/product-detail/Battery-Management_Shenzhen-Fuman-Elec-DW01-A-J_C2909013.html, Item Type=IC, Manufacturer Part Number=DW01-A/J
U2: "ESOP-8 Battery Management ICs ROHS", LCSC Part Number=C16581, Manufacturer=TOPPOWER, Package=ESOP-8, ComponentLink1Description=LCSC, ComponentLink1URL=https://www.lcsc.com/product-detail/Battery-Management-ICs_TOPPOWER-Nanjing-Extension-Microelectronics-TP4056-42-ESOP8_C16581.html, Item Type=IC, Manufacturer Part Number=TP4056-42-ESOP8
U3: "20V 5A 36mΩ@2.5V,3A 830mW 1.2V@250uA 2 N-Channel SOT-23-6 MOSFETs ROHS", LCSC Part Number=C351449, Manufacturer=UMW, Package=SOT-23-6, ComponentLink1Description=LCSC, ComponentLink1URL=https://www.lcsc.com/product-detail/MOSFETs_UMW-Youtai-Semiconductor-Co-Ltd-8205A_C351449.html, Item Type=IC, Manufacturer Part Number=8205A
U4: "IC REG LDO 3.3V 0.25A SOT23-3", Case/Package=SOT-23, Dropout Voltage=178mV, Input Bias Current=1.6uA, Manufacturer=Microchip, Max Input Voltage=6V, Max Operating Temperature=125°C, Max Output Current=250mA, Max Output Voltage=3.3V, Max Power Dissipation=369.6mW, Min Input Voltage=2.3V, Min Operating Temperature=-40°C, Nominal Supply Current=4uA, Output Voltage Accuracy=2%, Package Quantity=3000, Supplier Part Number 1=MCP1700T3302ETTCT-ND, Accuracy=2%, Category="Voltage Regulators - Linear", ComponentLink1Description=https://datasheet.ciiva.com/5801/1784514-5801824.pdf?src-supplier=Farnell, ComponentLink1URL=https://datasheet.ciiva.com/5801/1784514-5801824.pdf?src-supplier=Farnell, ComponentLink2Description=https://datasheet.ciiva.com/2040/21826b-2040112.pdf?src-supplier=Digi-Key, ComponentLink2URL=https://datasheet.ciiva.com/2040/21826b-2040112.pdf?src-supplier=Digi-Key, ComponentLink3Description=https://datasheet.ciiva.com/7649/1784514-7649813.pdf?src-supplier=Element14, ComponentLink3URL=https://datasheet.ciiva.com/7649/1784514-7649813.pdf?src-supplier=Element14, ComponentLink4Description=https://datasheet.ciiva.com/22710/1784514-22710988.pdf?src-supplier=Element14, ComponentLink4URL=https://datasheet.ciiva.com/22710/1784514-22710988.pdf?src-supplier=Element14, ComponentLink5Description=https://datasheet.ciiva.com/14150/mcp1700-eng-tds-14150122.pdf?src-supplier=Distrelec, ComponentLink5URL=https://datasheet.ciiva.com/14150/mcp1700-eng-tds-14150122.pdf?src-supplier=Distrelec, ComponentLink6Description=https://datasheet.ciiva.com/8041/1784514-8041598.pdf?src-supplier=Element14, ComponentLink6URL=https://datasheet.ciiva.com/8041/1784514-8041598.pdf?src-supplier=Element14, ComponentLink7Description=https://datasheet.ciiva.com/3224/jp011779-3224133.pdf?src-supplier=Avnet, ComponentLink7URL=https://datasheet.ciiva.com/3224/jp011779-3224133.pdf?src-supplier=Avnet, ComponentLink8Description=https://datasheet.ciiva.com/16208/filehandler-aspxddocname-en011779-16208911.pdf?src-supplier=Future+Electronics, ComponentLink8URL=https://datasheet.ciiva.com/16208/filehandler-aspxddocname-en011779-16208911.pdf?src-supplier=Future+Electronics, ComponentLink9Description=https://datasheet.ciiva.com/15200/getdatasheetpartid-453599-15200229.pdf?src-supplier=Verical, ComponentLink9URL=https://datasheet.ciiva.com/15200/getdatasheetpartid-453599-15200229.pdf?src-supplier=Verical, ComponentLink10Description=https://datasheet.ciiva.com/2040/21826b-2040113.pdf?src-supplier=Digi-Key, ComponentLink10URL=https://datasheet.ciiva.com/2040/21826b-2040113.pdf?src-supplier=Digi-Key, ComponentLink11Description=https://datasheet.ciiva.com/2040/21826b-2040114.pdf?src-supplier=Digi-Key, ComponentLink11URL=https://datasheet.ciiva.com/2040/21826b-2040114.pdf?src-supplier=Digi-Key, ComponentLink12Description=https://datasheet.ciiva.com/29305/651414-da-01-en-ic-reg-ld-mcp1700t-3302e-tt-sot-23-3-mcp-29305258.pdf?src-supplier=Conrad, ComponentLink12URL=https://datasheet.ciiva.com/29305/651414-da-01-en-ic-reg-ld-mcp1700t-3302e-tt-sot-23-3-mcp-29305258.pdf?src-supplier=Conrad, Contact Plating=Tin,Matte, Height=0.95mm, Item Type=IC, Lead Free="Lead Free", Length=2.9mm, Manufacturer Part Number=MCP1700T-3302E/TT, Max Supply Voltage=6V, Min Output Voltage=3.3V, Min Supply Voltage=2.3V, Mount="Surface Mount", Nominal Output Voltage=3.3V, Number of Outputs=1, Number of Pins=3, Output Current=250mA, Output Type=Fixed, Output Voltage=3.3V, Packaging="Tape and Reel", Polarity=Positive, Power Dissipation=369.6mW, Pricing 1="1=0.50000, 25=0.42400, 100=0.37500 (USD)", Quiescent Current=4uA, Radiation Hardening=No, Reach SVHC Compliant="No SVHC", RoHS=Yes, RoHS Compliant=Yes, Stock 1=230029, Supplier 1=Digi-Key, Supply Current=4uA, Termination=SMD/SMT, Width=1.3mm
U5: "IC REG BUCK-BST ADJ 3.5A 14VSON", Case/Package=VSON, LCSC Part Number=C15483, Manufacturer="Texas Instruments", Max Operating Temperature=85°C, Max Output Current=3A, Max Output Voltage=5.5V, Min Input Voltage=1.8V, Min Operating Temperature=-40°C, Min Output Voltage=1.2V, Package Quantity=3000, Quiescent Current=50uA, Supplier Part Number=595-TPS63020DSJR, Switching Frequency=2.4MHz, Category="Voltage Regulators - Switching", ComponentLink1Description=https://datasheet.ciiva.com/29733/tps63021-29733058.pdf?src-supplier=Digi-Key, ComponentLink1URL=https://datasheet.ciiva.com/29733/tps63021-29733058.pdf?src-supplier=Digi-Key, ComponentLink2Description=https://datasheet.ciiva.com/29733/tps63020-29733142.pdf?src-supplier=Digi-Key, ComponentLink2URL=https://datasheet.ciiva.com/29733/tps63020-29733142.pdf?src-supplier=Digi-Key, ComponentLink3Description=https://datasheet.ciiva.com/3221/tps63020-3221509.pdf?src-supplier=Avnet, ComponentLink3URL=https://datasheet.ciiva.com/3221/tps63020-3221509.pdf?src-supplier=Avnet, Efficiency=96%, Item Type=IC, Lead Free="Lead Free", Manufacturer Part Number=TPS63020DSJR, Max Supply Voltage=5.5V, Min Supply Voltage=1.8V, Mounting Technology="Surface Mount", Number of Outputs=1, Operating Supply Voltage=5.5V, Output Configuration=Positive, Output Current=3A, Output Type=Adjustable, Output Voltage=5.5V, Packaging="Tape and Reel", Pins=14, Pricing="1=2.8, 10=2.43, 50=2.43, 100=2.07, 1000=1.46, 10000=1.36 (USD)", Reach SVHC Compliant=No, RoHS=Yes, RoHS Compliant=Yes, Series=-, Stock=18181, Supplier=Mouser, Supply Current=50uA, Synchronous Rectifier=Yes, Topology=Buck-Boost
U6: "RX TXRX MOD WIFI TRACE ANT SMD", LCSC Part Number=C701341, Manufacturer="Espressif Systems", Supplier Part Number 1=1965-ESP32-WROOM-32E(4MB)CT-ND, ComponentLink1Description="LCSC Link", ComponentLink1URL=https://lcsc.com/product-detail/WiFi-Modules_ESPRESSIF-ESP32-WROOM-32E-N4_C701341.html, Manufacturer Part Number=ESP32-WROOM-32E-N4, Pricing 1="1=3.00000 (USD)", RoHS=No, Supplier 1=Digi-Key
U7: "2 NPN pre-biased (Dual) 150mW 100mA 50V SC-70-6(SOT-363) Digital Transistors ROHS", LCSC Part Number=C62892, Manufacturer=Changjiang, ComponentLink1Description=LCSC, ComponentLink1URL=https://www.lcsc.com/product-detail/Digital-Transistors_Jiangsu-Changjing-Electronics-Technology-Co-Ltd-UMH3N_C62892.html, Item Type=Transistor, Manufacturer Part Number=UMH3N
U8: "20ms Active Low 900mV~5.5V 1 SOT-23R Supervisor and Reset ICs ROHS", LCSC Part Number=C5589080, Manufacturer=DIODES, Package=SOT-23R, ComponentLink1Description="LCSC Link", ComponentLink1URL=https://lcsc.com/product-detail/Supervisor-and-Reset-ICs_DIODES-APX803L20-29SR-7_C5589080.html?s_z=n_C5589080, Item Type="Cutt off IC", Manufacturer Part Number=APX803L20-29SR-7
U9: "2Mbps Transceiver USB 2.0 SOP-16 USB ICs ROHS", LCSC Part Number=C84681, Manufacturer=WCH, Package=SOP-16, ComponentLink1Description=LCSC, ComponentLink1URL=https://www.lcsc.com/product-detail/USB-ICs_WCH-Jiangsu-Qin-Heng-CH340C_C84681.html, Item Type=IC, Manufacturer Part Number=CH340C
U10: "IC TRANSCEIVER FULL 2/2 24SQFN", LCSC Part Number=C45223, Manufacturer=MICROCHIP, Max Operating Temperature=85°C, Min Operating Temperature=0°C, Package=QFN-24-EP(4x4), ComponentLink1Description="LCSC Link", ComponentLink1URL=https://www.lcsc.com/product-detail/C45223.html?s_z=n_LAN8720A, Item Type=RMII, Manufacturer Part Number=LAN8720A-CP-TR, Mount="Surface Mount", Packaging="Tape and Reel", Simplex/Duplex="Full Duplex"
U11: "IC BATT MON LI-ION 1CELL 8TDFN", LCSC Part Number=C2682616, Manufacturer=Maxim, Max Operating Temperature=85°C, Min Operating Temperature=-20°C, Operating Supply Current=23uA, Operating Supply Voltage=4.5V, Output Voltage=400mV, Package Quantity=10000, Supplier Part Number 1=700-MAX17048G+T10, Category="Battery Management", ComponentLink1Description=https://datasheet.ciiva.com/14083/max17048-max17049-14083973.pdf?src-supplier=Digi-Key, ComponentLink1URL=https://datasheet.ciiva.com/14083/max17048-max17049-14083973.pdf?src-supplier=Digi-Key, Contact Plating=Tin,Matte, Item Type=IC, Manufacturer Part Number=MAX17048G+T10, Mount="Surface Mount", Number of Pins=8, Packaging="Tape and Reel", Pricing 1="1=3.34000, 10=3.00000, 50=2.84000, 100=2.46000, 1000=1.89000, 10000=1.83000 (USD)", Radiation Hardening=No, RoHS=Yes, RoHS Compliant=Yes, Series=ModelGauge™, Stock 1=41293, Supplier 1=Mouser
X1: library part OT2EL4C4JI-111OLP-50M, "1.8V~3.3V ±10ppm ±20ppm CMOS 50MHz SMD3225-4P Crystal Oscillators ROHS", LCSC Part Number=C5203552, Manufacturer="YXC Crystal Oscillators", Package=SMD3225-4P, ComponentLink1Description="LCSC Link", ComponentLink1URL=https://lcsc.com/product-detail/Crystal-Oscillators_YXC-Crystal-Oscillators-OT2EL4C4JI-111OLP-50M_C5203552.html, Item Type=Crystal, Manufacturer Part Number=OT2EL4C4JI-111OLP-50M

## Free pads (board coordinates)
  round 196.85 hole 118.11 paste+4.8 mask+0.59: 10(447.72,211.49) 10(447.72,1363.31) 10(3725.51,211.49) 10(3725.51,1363.31)

## Via types
v1: diameter 23.62, hole 11.81, Top Layer to Bottom Layer, tented top, 190 vias

## Nets (pads, with @x,y where several pads share a name; then routed paths per layer and width w, separated by ;. In a path a pad name is that pad's centre, name@x,y a point inside that pad or via, vN(x,y) a via of type N, cw(c..) or ccw(c..) an arc to the next point about the centre after c; other vN are vias at no path point)
+3.3_OUT: C21.2 C22.2 C23.2 C28.1 C29.1 C34.2 C35.1 C36.1 C38.2 D11.1 FB2.2 LED1.5 R20.2 R27.2 R30.2 R32.2 R33.2 R38.2 R40.2 R45.2 R49.2 SW1.4 U6.2 U9.4 U9.16 U10.9 X1.4 | length 4954.5
  Top Layer w9.5: v1@1480.6,1135.36 1497.2,1151.96 R33.2@1497.2,1226.78 1478.22,1226.78 1470,1235 1470,1363.36 1475.57,1368.93 R49.2@1497.2,1368.93 ; R38.2@2461,561.41 R40.2@2419.92,561.41 2417.13,564.19 2362.81,564.19 2348.22,578.78 2348.22,737.97 2390.09,779.84 v1(2445.78,779.84) U10.9@2557.22,779.84
  Top Layer w15: SW1.4@161.74,1462.44 227.56,1462.44 289.15,1400.85 289.15,1235.85 318,1207 718.13,1207 786.57,1138.56 842.52,1138.56 ; U9.16@686.73,402 690.23,405.5 715.86,405.5 861.02,550.66 899.94,550.66 U9.4@901.27,552 902.05,551.22 949.12,551.22 v1(949.9,550.44) ; 842.52,1133.78 842.52,1138.56 ; LED1.5@842.52,1300.32 842.52,1138.56 ; D11.1@891,1138.56 842.52,1138.56 ; v1@949.89,552.27 950.72,551.43 977.9,551.43 C28.1@978.9,552.43 ; R32.2@1640.24,1226.49 R32.2@1639.95,1226.78 1639.95,1170.61 1613,1143.66 v1(1613,1141.7) R30.2@1613,1089.5 1614.5,1091 1618,1091 1631.7,1104.7 2239.17,1104.7 v1(2270.63,1136.16)
  Bottom Layer w15: v1(890.92,1123.67) 968.75,1123.67 983.74,1108.67 ; v1(949.9,550.44) 986.86,587.4 986.86,1109.45 ; 989.92,1110.22 1038.92,1159.22 1376.78,1159.22 1394.3,1141.7 v1(1480.6,1141.7) v1(1613,1141.7) ; v1(2270.63,1136.16) v1(2444.03,1136.16) ; v1@2443.03,1136.16 2444.41,1134.78 2444.41,781.22 v1@2445.26,780.37
  other v1: 2432.42,365.34 2478.83,365.34 2440.46,429.91 2440.46,465.34
+3.3V_IN: C15.2 C16.2 C17.2 C18.2 R14.2 SW1.2 U5.4 U5.5 | length 2307.4
  Top Layer w15: SW1.2@161.74,1198.66 23.32,1060.24 23.32,59.68 53.01,29.99 1049.49,29.99 1066.71,47.21 R14.2@1066.71,95.49